# EAGLE board noValue (EAGLE 7.5.0)
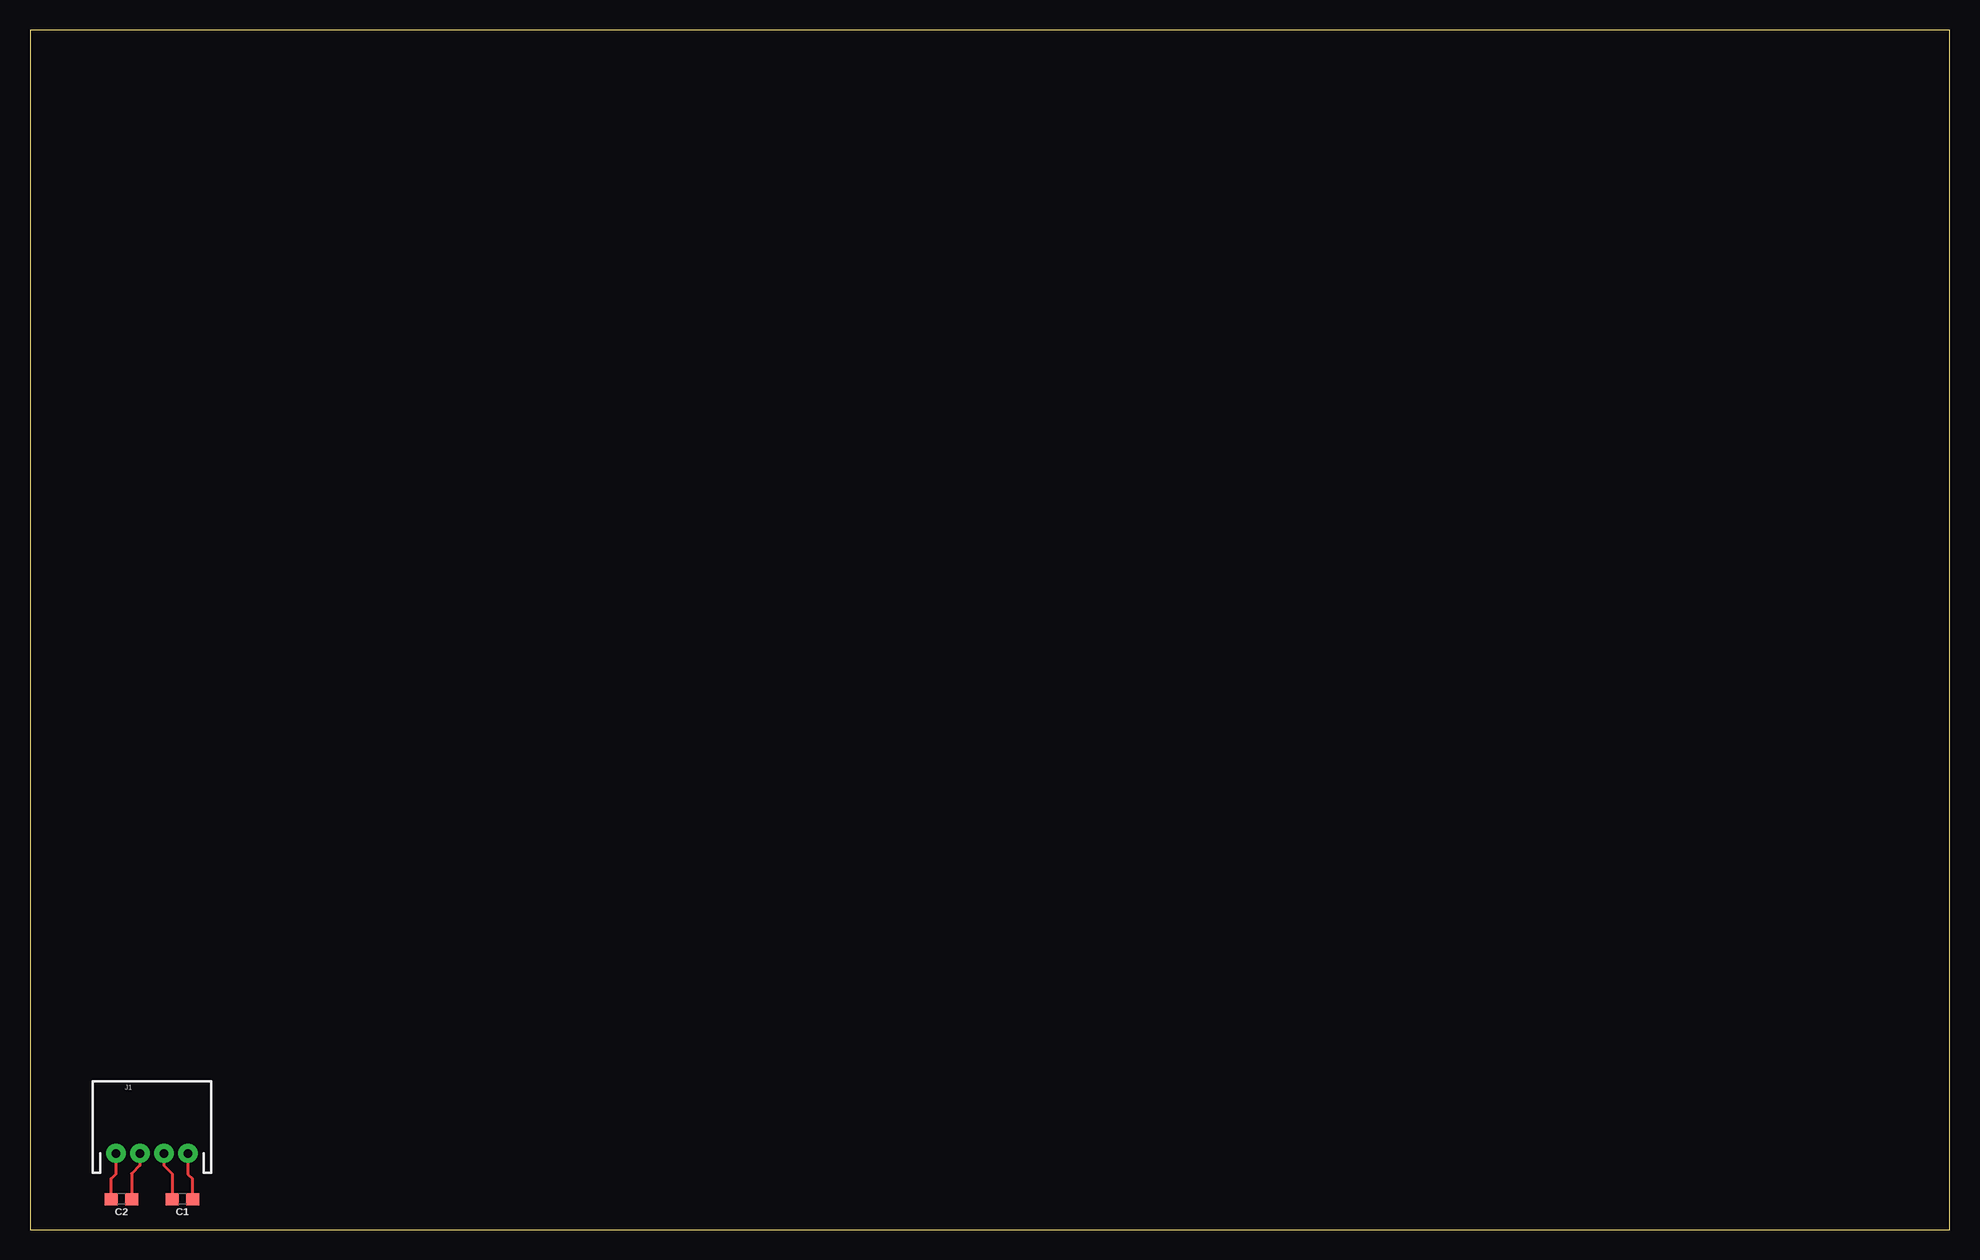
[diagram p0: board, top side]

Size 160 x 100 mm. Coordinates in mm from the lower left corner, seen from the top.
Outline: 0,0 160,0 160,100 0,100 0,0
Copper layers (1*16): Top 0.035mm / dielectric 1.5mm / Bottom 0.035mm
Design rules "default": minimum track width 10mil, minimum drill 0.6mm, track to track 8mil, track to pad 8mil, pad to pad 8mil, via to via 8mil, smd to smd 8mil, copper to edge 40mil, drill to drill 8mil, minimum pad ring 10mil, minimum via ring 8mil, stop-mask expansion 4mil, vias tented up to drill 0mil, thermal gap 10mil

## Footprints (pad centres in the part's own frame; a part is rotated, then mirrored left to right if it is on the bottom)
0603 = smd 1.1 x 1: 1 -0.85,0; 2 0.85,0
JST-4-PTH = drill 0.7 pad 1.6: 1 -3,0; 2 -1,0; 3 1,0; 4 3,0

## Placement (x,y rotation side)
C1  0.1uF  [0603]  12.7,2.54 180 top
C2  0.1uF  [0603]  7.62,2.54 180 top
J1  M04JST-PTH  [JST-4-PTH]  10.16,6.35 0 top

## Library data of the parts
C1 C2 = SparkFun-Capacitors; PROD_ID: CAP-08604
J1 = SparkFun-Connectors; SKU: PRT-09916

## Nets
N$1: C2.1 J1.2
N$2: C1.2 J1.3
N$3: C1.1 J1.4
N$4: C2.2 J1.1

## Tracks (layer width: path | path; a pad name or v marks a point on that pad's centre or on a via)
N$1
  Top 0.254: J1.2 9.16,5.35 8.47,4.66 C2.1
N$2
  Top 0.254: J1.3 11.16,5.35 11.85,4.66 C1.2
N$3
  Top 0.254: C1.1 13.55,4.23 13.16,4.62 J1.4
N$4
  Top 0.254: J1.1 7.16,4.62 6.77,4.23 C2.2